# Altium PCB AfternoonCape_RevB1_TImux.PcbDoc
Units mil, origin at the board's own origin, x right, y up, seen from the top; angles counter-clockwise.
Board outline 3400 x 2150.01 mil, 2 copper layers (Top Layer, Bottom Layer); 38 components, 107 nets, 395 pads, 1 vias.
Unrouted connection lines stored in the file: 201.
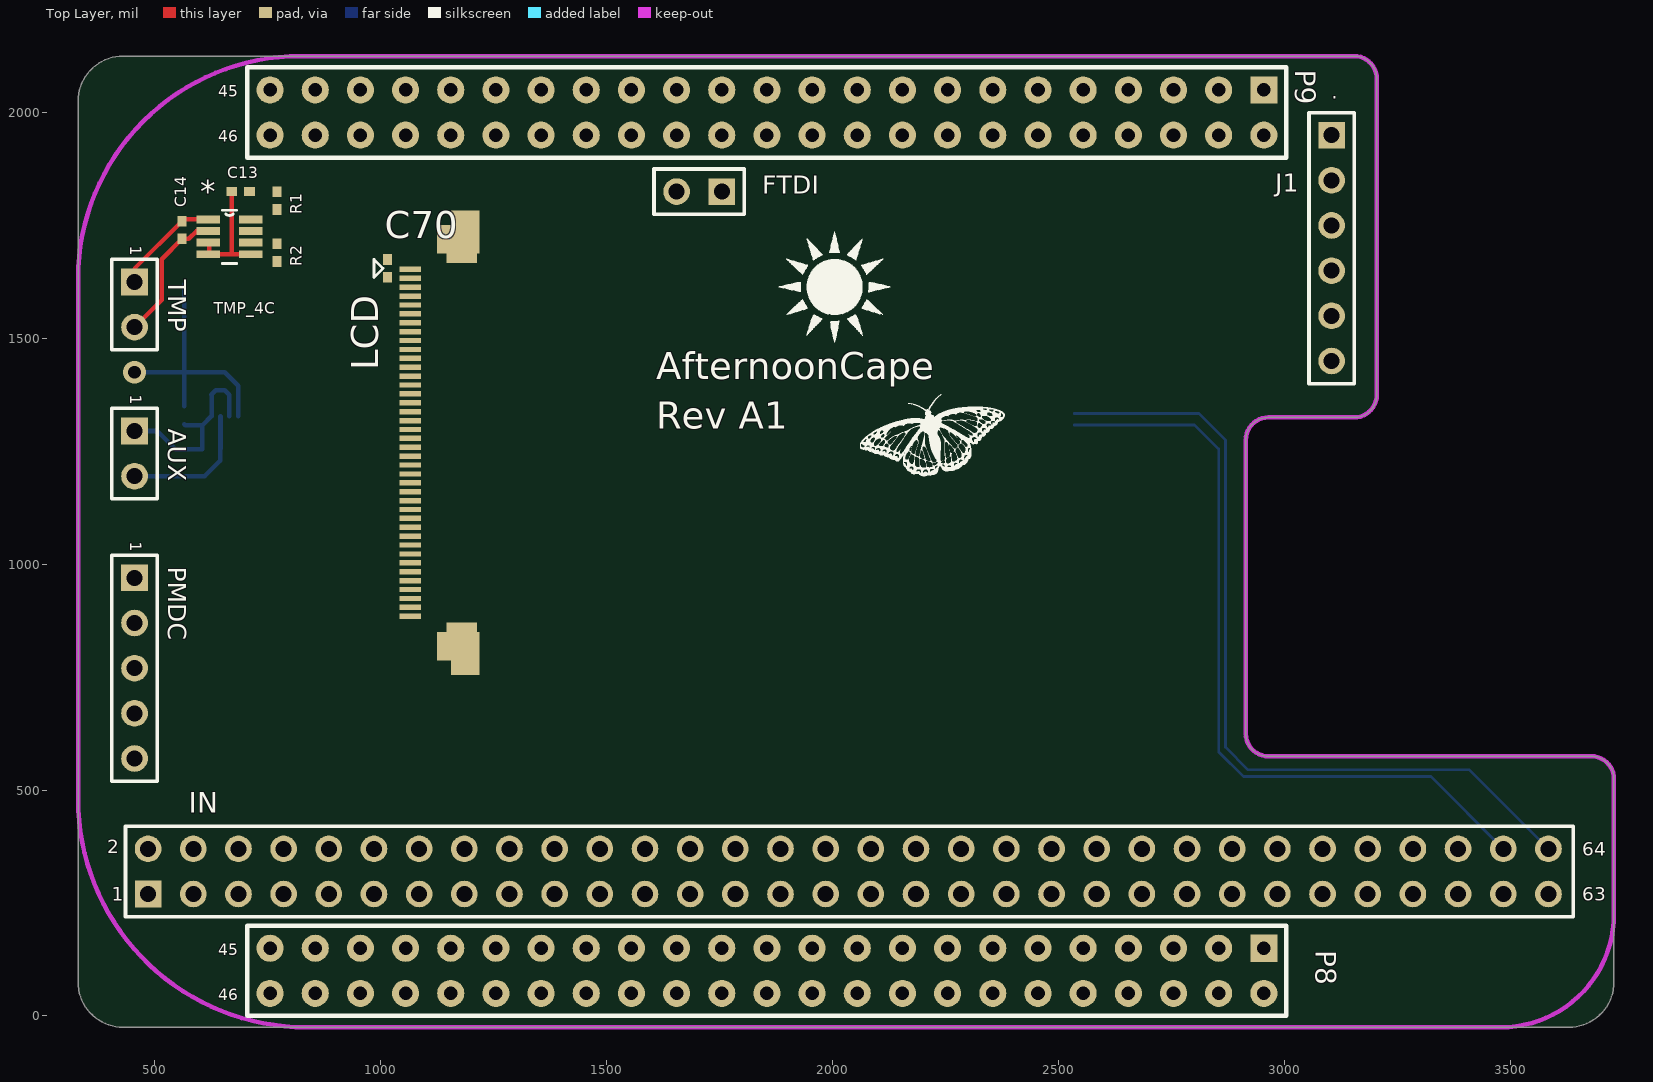
[diagram p0: Top Layer view]
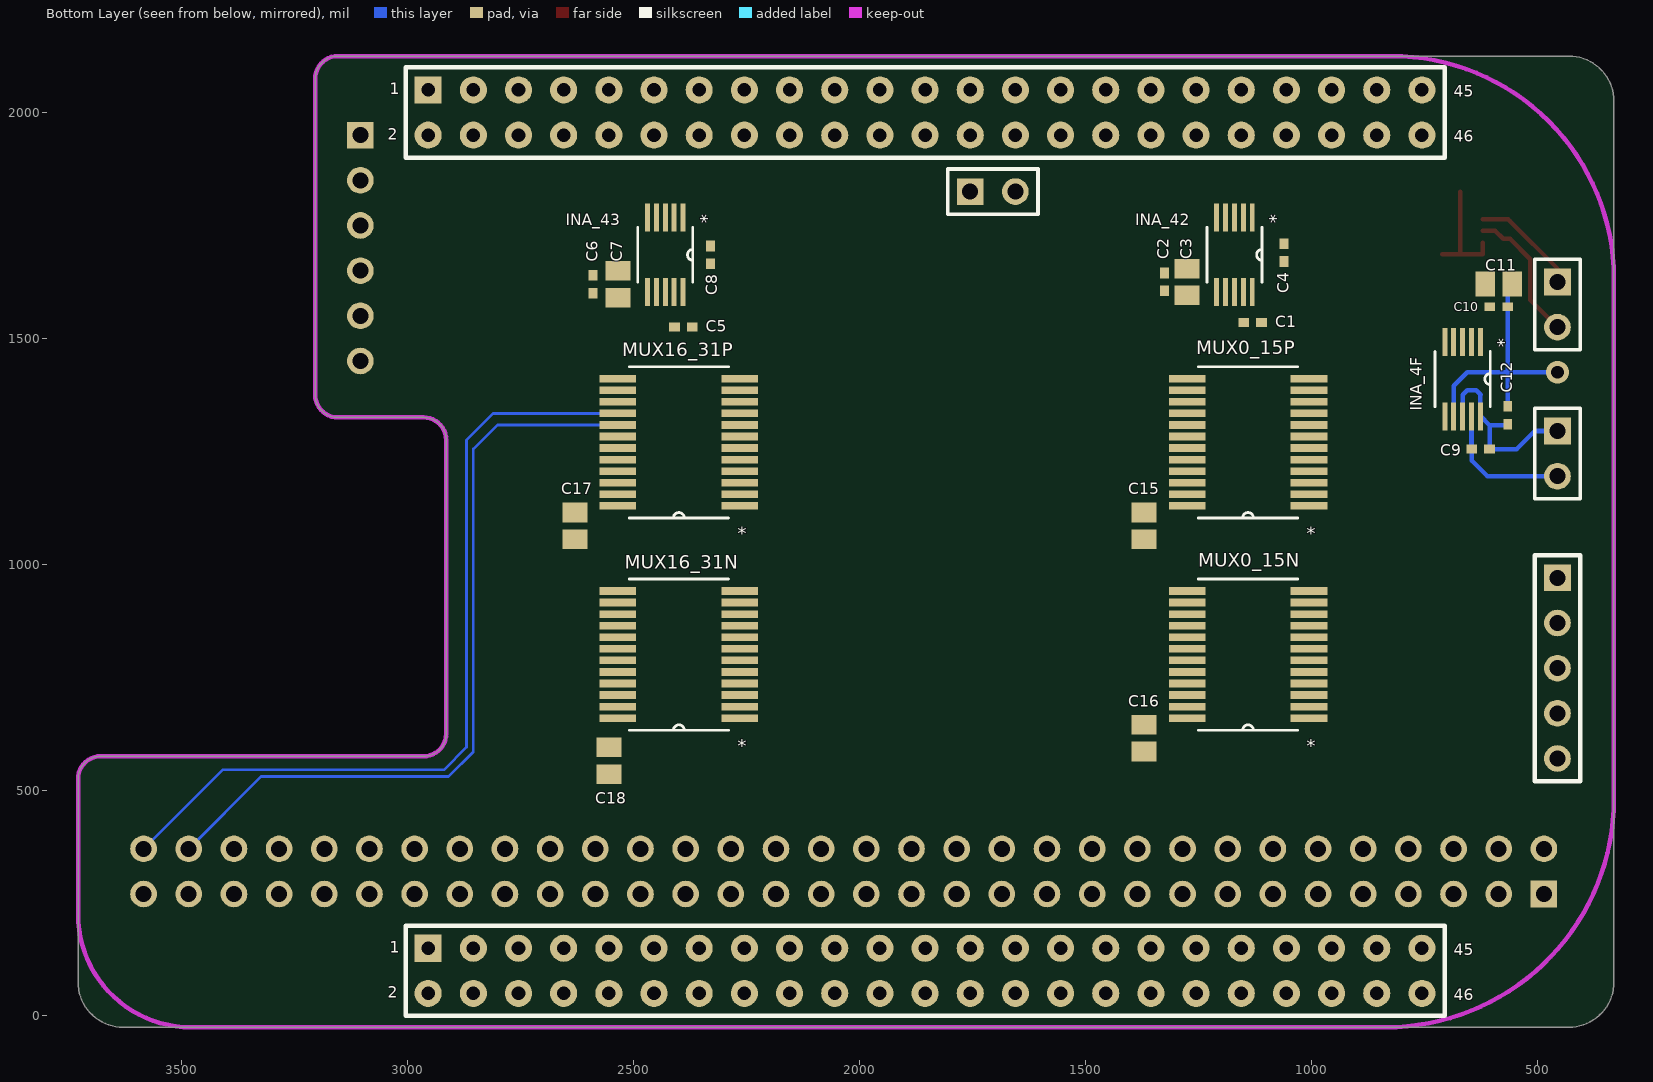
[diagram p1: Bottom Layer view, seen from below]

## Layer stack, top to bottom
Top Layer: signal copper 1.4
Dielectric: dielectric 12.6, FR-4, Dk 4.8
Bottom Layer: signal copper 1.4

## Board outline
3155,2125 3154.99,2125.01 822.5,2125.01 430,2125.01 ccw(c430,2025.01) 330,2025.01 330,480 330,75 ccw(c430,75) 430,-25 845,-25 3450,-25 3630,-25 ccw(c3630,75) 3730,75 3730,285 3730,525 ccw(c3680,525) 3680,575 2980,575 2965,575 cw(c2965,625) 2915,625 2915,1275 cw(c2965,1275) 2965,1325 2980,1325 3155,1325 ccw(c3155,1375) 3205,1375 3205,2075 ccw(c3155,2075) 3155,2125 3150,2125

## Design rules (kind name [scope] priority, off if disabled: settings)
Clearance [All] p1: gap=6
MinimumSolderMaskSliver [All] p1: minsoldermaskwidth=0
PolygonConnect [All] p1: connectstyle=Relief reliefconductorwidth=10 reliefentries=4 polygonreliefangle="90 Angle"
RoomDefinition AfternoonCape_RevB1_TImux [InComponentClass('AfternoonCape_RevB1_TImux')] p1: confinementstyle=ConfineIn formatcopy=TRUE lockcomponents=FALSE outline -450,-935 6010,-935 6010,2690 -450,2690
RoutingVias [All] p1: holewidth=13 width=27 viastyle="Through Hole" minholewidth=13 minwidth=27 maxholewidth=28 maxwidth=50
SilkscreenOverComponentPads [All] p1: minsilkscreentomaskgap=10
SolderMaskExpansion [All] p1: expansion=4
Width [All] p1: maxlimit=20 minlimit=6 preferedwidth=6
26 further rules are at their usual default settings.

## Components (designator, comment, footprint, x,y, rotation, side; value= is the part's Value field where it differs from the comment)
AUX "Header 2" HDR1X2 455,1295 r270 top
C1 "Cap Semi" 0402 1130,1535 r180 bottom
C2 "Cap Semi" 0402 1325,1625 r270 bottom
C3 "Cap Semi" C0805 1275,1625 r270 bottom
C4 "Cap Semi" 0402 1060,1690 r270 bottom
C5 "Cap Semi" 0402 2390,1525 r180 bottom
C6 "Cap Semi" 0402 2590,1620 r270 bottom
C7 "Cap Semi" C0805 2535,1620 r270 bottom
C8 "Cap Semi" 0402 2330,1685 r270 bottom
C9 "Cap Semi" 0402 625,1255 r180 bottom
C10 "Cap Semi" 0402 585,1570 r0 bottom
C11 "Cap Semi" C0805 585,1620 r0 bottom
C12 "Cap Semi" 0402 565,1330 r270 bottom
C13 "Cap Semi" 0402 690,1825 r0 top
C14 "Cap Semi" 0402 560,1740 r90 top
C15 "Cap Semi" C0805 1370,1085 r90 bottom
C16 "Cap Semi" C0805 1370,615 r90 bottom
C17 "Cap Semi" C0805 2630,1085 r90 bottom
C18 "Cap Semi" C0805 2555,565 r90 bottom
C70 "Cap Semi" 0402 1015,1655 r270 top
FTDI "Header 2" HDR1X2 1755,1825 r180 top
IN "Header 32x2" HDR2x32 485,270 r0 top
INA_4F "INA226" DGS10 665,1410 r270 bottom
INA_42 "INA226" DGS10 1170,1685 r270 bottom
INA_43 "INA226" DGS10 2430,1685 r270 bottom
J1 "Header 6" HDR1X6 3105,1950 r270 top
LCD "NHD-2.4" NHD-2.4 1065,885 r90 top
MUX0_15N "CD74HC4067_DB_24" DB24 1140,800 r0 bottom
MUX0_15P "CD74HC4067_DB_24" DB24 1140,1270 r0 bottom
MUX16_31N "CD74HC4067_DB_24" DB24 2400,800 r0 bottom
MUX16_31P "CD74HC4067_DB_24" DB24 2400,1270 r0 bottom
P8 "FEMALE HEADER 2x23" HEADER23X2 1855,100 r180 top
P9 "FEMALE HEADER 2x23" HEADER23X2 1855,2000 r180 top
PMDC "Header 5" HDR1X5 455,970 r270 top
R1 "Res3" 0402 770,1805 r90 top
R2 "Res3" 0402 770,1690 r270 top
TMP "Header 2" HDR1X2 455,1625 r270 top
TMP_4C "TMP441_DCN_8" DCN8 665,1725 r0 top

## Footprints (in the part's own frame and the unit in brackets; to place one, negate y for a bottom-side part, rotate by r counter-clockwise, add the part's x,y. Pads: shape width x height; smd on the part's side, far side on the other; paste and mask are expansions set on the pad)
0402 [mm] "Chip Capacitor, Body 1.0x0.5mm, IPC High Density"
  rect 0.6x0.5 smd: 1(-0.5,0) 2(0.5,0)
  body extent -0.55,-0.3 0.55,0.3, height 1.3
C0805 [mm] "Chip Capacitor, Body 2.0x1.3mm, IPC High Density"
  rect 1.1x1.4 smd: 1(-0.75,0) 2(0.75,0)
  body extent -1.1,-0.72 1.1,0.72, height 1.4
DB24 [mil]
  rect 81x17 smd: 1(-135,140.75) 2(-135,115.16) 3(-135,89.57) 4(-135,63.98) 5(-135,38.39) 6(-135,12.8) 7(-135,-12.8) 8(-135,-38.39) 9(-135,-63.98) 10(-135,-89.57) 11(-135,-115.16) 12(-135,-140.75) 13(135,-140.75) 14(135,-115.16) 15(135,-89.57) 16(135,-63.98) 17(135,-38.39) 18(135,-12.8) 19(135,12.8) 20(135,38.39) 21(135,63.98) 22(135,89.57) 23(135,115.16) 24(135,140.75)
  silkscreen extent -110,-168 110,168
DCN8 [mil]
  rect 52x17 smd: 1(-47,38.39) 2(-47,12.8) 3(-47,-12.8) 4(-47,-38.39) 5(47,-38.39) 6(47,-12.8) 7(47,12.8) 8(47,38.39)
  silkscreen extent -16,-59 16,59
DGS10 [mil]
  rect 62x11 smd: 1(-82.5,39.37) 2(-82.5,19.68) 3(-82.5,0) 4(-82.5,-19.68) 5(-82.5,-39.37) 6(82.5,-39.37) 7(82.5,-19.68) 8(82.5,0) 9(82.5,19.68) 10(82.5,39.37)
  silkscreen extent -61,-61 61,61, body extent -96,-59 97,59, height 37
HDR1X2 [mm] "Connector; Header; 2 Position"
  rect 1.5x1.5 hole 0.9: 1(0,0)
  round 1.5 hole 0.9: 2(2.54,0)
  silkscreen extent -1.27,-1.27 3.81,1.27
HDR1X5 [mm] "Connector; Header; 5 Position"
  rect 1.5x1.5 hole 0.9: 1(0,0)
  round 1.5 hole 0.9: 2(2.54,0) 3(5.08,0) 4(7.62,0) 5(10.16,0)
  silkscreen extent -1.27,-1.27 11.43,1.27
HDR1X6 [mm] "Connector; Header; 6 Position"
  rect 1.5x1.5 hole 0.9: 1(0,0)
  round 1.5 hole 0.9: 2(2.54,0) 3(5.08,0) 4(7.62,0) 5(10.16,0) 6(12.7,0)
  silkscreen extent -1.27,-1.27 13.97,1.27
HDR2x32 [mm]
  rect 1.5x1.5 hole 0.9: 1(0,0)
  round 1.5 hole 0.9: 2(0,2.54) 3(2.54,0) 4(2.54,2.54) 5(5.08,0) 6(5.08,2.54) 7(7.62,0) 8(7.62,2.54) 9(10.16,0) 10(10.16,2.54) 11(12.7,0) 12(12.7,2.54) 13(15.24,0) 14(15.24,2.54) 15(17.78,0) 16(17.78,2.54) 17(20.32,0) 18(20.32,2.54) 19(22.86,0) 20(22.86,2.54) 21(25.4,0) 22(25.4,2.54) 23(27.94,0) 24(27.94,2.54) 25(30.48,0) 26(30.48,2.54) 27(33.02,0) 28(33.02,2.54) 29(35.56,0) 30(35.56,2.54) 31(38.1,0) 32(38.1,2.54) 33(40.64,0) 34(40.64,2.54) 35(43.18,0) 36(43.18,2.54) 37(45.72,0) 38(45.72,2.54) 39(48.26,0) 40(48.26,2.54) 41(50.8,0) 42(50.8,2.54) 43(53.34,0) 44(53.34,2.54) 45(55.88,0) 46(55.88,2.54) 47(58.42,0) 48(58.42,2.54) 49(60.96,0) 50(60.96,2.54) 51(63.5,0) 52(63.5,2.54) 53(66.04,0) 54(66.04,2.54) 55(68.58,0) 56(68.58,2.54) 57(71.12,0) 58(71.12,2.54) 59(73.66,0) 60(73.66,2.54) 61(76.2,0) 62(76.2,2.54) 63(78.74,0) 64(78.74,2.54)
  silkscreen extent -1.27,-1.27 80.14,3.81
HEADER23X2 [mil] "HEADER23X2"
  rect 60x60 hole 30 mask+2: 1(-1100,-50)
  round 60 hole 30 mask+2: 2(-1100,50) 3(-1000,-50) 4(-1000,50) 5(-900,-50) 6(-900,50) 7(-800,-50) 8(-800,50) 9(-700,-50) 10(-700,50) 11(-600,-50) 12(-600,50) 13(-500,-50) 14(-500,50) 15(-400,-50) 16(-400,50) 17(-300,-50) 18(-300,50) 19(-200,-50) 20(-200,50) 21(-100,-50) 22(-100,50) 23(0,-50) 24(0,50) 25(100,-50) 26(100,50) 27(200,-50) 28(200,50) 29(300,-50) 30(300,50) 31(400,-50) 32(400,50) 33(500,-50) 34(500,50) 35(600,-50) 36(600,50) 37(700,-50) 38(700,50) 39(800,-50) 40(800,50) 41(900,-50) 42(900,50) 43(1000,-50) 44(1000,50) 45(1100,-50) 46(1100,50)
  silkscreen extent -1150,-100 1150,100
NHD-2.4 [mm]
  rect 0.3x1.2 smd: 1(19.5,0) 2(19,0) 3(18.5,0) 4(18,0) 5(17.5,0) 6(17,0) 7(16.5,0) 8(16,0) 9(15.5,0) 10(15,0) 11(14.5,0) 12(14,0) 13(13.5,0) 14(13,0) 15(12.5,0) 16(12,0) 17(11.5,0) 18(11,0) 19(10.5,0) 20(10,0) 21(9.5,0) 22(9,0) 23(8.5,0) 24(8,0) 25(7.5,0) 26(7,0) 27(6.5,0) 28(6,0) 29(5.5,0) 30(5,0) 31(4.5,0) 32(4,0) 33(3.5,0) 34(3,0) 35(2.5,0) 36(2,0) 37(1.5,0) 38(1,0) 39(0.5,0) 40(0,0)
  rect 0.8x1.6 smd: ""(-2.9,-3.1) ""(22.4,-3.1)
  rect 1.6x2.4 smd: ""(-1.7,-2.7) ""(21.2,-2.7)
  rect 0.55x1.7 smd: ""(-0.625,-2.9) ""(20.125,-2.9)
  silkscreen extent 19.05,1.52 20.07,2.03, body extent -2.97,-6.78 22.53,0.38, height 2

## Part data
AUX FTDI TMP: "Header, 2-Pin"
C1 C2 C3 C4 C5 C6 C7 C8 C9 C10 C11 C12 C13 C14 C15 C16 C17 C18 C70: "Capacitor (Semiconductor SIM Model)"
IN: "Header, 32-Pin, Dual row"
J1: "6-pin female header, long legs for FTDI-USB cable"
LCD: "2.4\" LCD NHD-2.4-240320SF-CTXL#-FTN1 54132-4062 Molex LCD Connector Footprint"
MUX0_15N MUX0_15P MUX16_31N MUX16_31P TMP_4C: "Imported"
P8 P9: library part HDR_46_F_2_0.1_0.1, "CONN HEADER FMAL 46PS.1\" DL GOLD"
PMDC: "Header, 5-Pin"
R1 R2: "Resistor"

## Via types
v1: diameter 50, hole 28, Top Layer to Bottom Layer, 1 vias

## Nets (pads, with @x,y where several pads share a name; then routed paths per layer and width w, separated by ;. In a path a pad name is that pad's centre, name@x,y a point inside that pad or via, vN(x,y) a via of type N, cw(c..) or ccw(c..) an arc to the next point about the centre after c; other vN are vias at no path point)
AIN0: LCD.3 P9.39
AIN1: LCD.5 P9.40
AIN2: LCD.4 P9.37
AIN3: LCD.2 P9.38
ALERT: PMDC.4
AUX_N: AUX.2 C9.1 INA_4F.9 | length 302.1
  Bottom Layer w10: AUX.2 610,1195 644.68,1229.68 C9.1 645.32,1255.63 INA_4F.9
AUX_P: AUX.1 C9.2 C12.2 INA_4F.8 INA_4F.10 | length 432.3
  Bottom Layer w10: AUX.1 505,1295 545,1255 C9.2 605.31,1308 ; C12.2 567.32,1308 605.31,1308 ; INA_4F.10@624.82,1327.5 605.31,1308 ; INA_4F.10 625.63,1374.37 625,1375 635,1385 655,1385 665,1375 INA_4F.8
B_UART0_RX: FTDI.1 J1.4
B_UART0_TX: FTDI.2 J1.5
CH0_N: IN.1 MUX0_15N.9
CH0_P: IN.2 MUX0_15P.9
CH1_N: IN.3 MUX0_15N.8
CH1_P: IN.4 MUX0_15P.8
CH2_N: IN.5 MUX0_15N.7
CH2_P: IN.6 MUX0_15P.7
CH3_N: IN.7 MUX0_15N.6
CH3_P: IN.8 MUX0_15P.6
CH4_N: IN.9 MUX0_15N.5
CH4_P: IN.10 MUX0_15P.5
CH5_N: IN.11 MUX0_15N.4
CH5_P: IN.12 MUX0_15P.4
CH6_N: IN.13 MUX0_15N.3
CH6_P: IN.14 MUX0_15P.3
CH7_N: IN.15 MUX0_15N.2
CH7_P: IN.16 MUX0_15P.2
CH8_N: IN.17 MUX0_15N.23
CH8_P: IN.18 MUX0_15P.23
CH9_N: IN.19 MUX0_15N.22
CH9_P: IN.20 MUX0_15P.22
CH10_N: IN.21 MUX0_15N.21
CH10_P: IN.22 MUX0_15P.21
CH11_N: IN.23 MUX0_15N.20
CH11_P: IN.24 MUX0_15P.20
CH12_N: IN.25 MUX0_15N.19
CH12_P: IN.26 MUX0_15P.19
CH13_N: IN.27 MUX0_15N.18
CH13_P: IN.28 MUX0_15P.18
CH14_N: IN.29 MUX0_15N.17
CH14_P: IN.30 MUX0_15P.17
CH15_N: IN.31 MUX0_15N.16
CH15_P: IN.32 MUX0_15P.16
CH16_N: IN.33 MUX16_31N.9
CH16_P: IN.34 MUX16_31P.9
CH17_N: IN.35 MUX16_31N.8
CH17_P: IN.36 MUX16_31P.8
CH18_N: IN.37 MUX16_31N.7
CH18_P: IN.38 MUX16_31P.7
CH19_N: IN.39 MUX16_31N.6
CH19_P: IN.40 MUX16_31P.6
CH20_N: IN.41 MUX16_31N.5
CH20_P: IN.42 MUX16_31P.5
CH21_N: IN.43 MUX16_31N.4
CH21_P: IN.44 MUX16_31P.4
CH22_N: IN.45 MUX16_31N.3
CH22_P: IN.46 MUX16_31P.3
CH23_N: IN.47 MUX16_31N.2
CH23_P: IN.48 MUX16_31P.2
CH24_N: IN.49 MUX16_31N.23
CH24_P: IN.50 MUX16_31P.23
CH25_N: IN.51 MUX16_31N.22
CH25_P: IN.52 MUX16_31P.22
CH26_N: IN.53 MUX16_31N.21
CH26_P: IN.54 MUX16_31P.21
CH27_N: IN.55 MUX16_31N.20
CH27_P: IN.56 MUX16_31P.20
CH28_N: IN.57 MUX16_31N.19
CH28_P: IN.58 MUX16_31P.19
CH29_N: IN.59 MUX16_31N.18
CH29_P: IN.60 MUX16_31P.18
CH30_N: IN.61 MUX16_31N.17
CH30_P: IN.62 MUX16_31P.17 | length 1731.2
  Bottom Layer w6: MUX16_31P.17 2801.61,1308.39 2855,1255 2855,585 2910,530 3325,530 IN.62
CH31_N: IN.63 MUX16_31N.16
CH31_P: IN.64 MUX16_31P.16 | length 1847.6
  Bottom Layer w6: MUX16_31P.16 2811.02,1333.98 2870,1275 2870,595 2920,545 3410,545 IN.64
GND: C2.1 C3.1 C4.1 C6.1 C7.1 C8.1 C10.1 C11.1 C12.1 C13.1 C15.1 C16.1 C17.1 C18.1 C70.1 INA_4F.7 INA_42.1 INA_42.7 INA_43.1 INA_43.7 J1.1 LCD.1 LCD.10 LCD.33 LCD.34 LCD.35 LCD.36 LCD.37 LCD.39 MUX0_15N.12 MUX0_15N.15 MUX0_15P.12 MUX0_15P.15 MUX16_31N.12 MUX16_31N.15 MUX16_31P.12 MUX16_31P.15 P8.1 P8.2 P9.1 P9.2 P9.43 P9.44 P9.45 P9.46 PMDC.3 TMP_4C.3 TMP_4C.4 TMP_4C.5 | length 834.2
  Top Layer w10: TMP_4C.3@620,1712.2 620,1686.61 670,1686.61 ; C13.1 670.32,1686.93 670,1686.61 ; TMP_4C.5@710,1686.61 670,1686.61
  Bottom Layer w10: v1(455,1425) 565,1425 ; C12.1 565,1425 ; C11.1@565.32,1620 C10.1 565.32,1425.32 565,1425 ; INA_4F.7 684.68,1395 654.68,1425 565,1425
I2C2_SCL: INA_4F.1 INA_4F.2 INA_4F.5 INA_42.5 INA_43.2 INA_43.5 P9.19 PMDC.1 R1.1 TMP_4C.7
I2C2_SDA: INA_4F.4 INA_42.2 INA_42.4 INA_43.4 P9.20 PMDC.2 R2.1 TMP_4C.6
LCD_DATA0: LCD.14 P8.45
LCD_DATA1: LCD.15 P8.46
LCD_DATA2: LCD.16 P8.43
LCD_DATA3: LCD.17 P8.44
LCD_DATA4: LCD.18 P8.41
LCD_DATA5: LCD.19 P8.42
LCD_DATA6: LCD.20 P8.39
LCD_DATA7: LCD.21 P8.40
LCD_DATA8: LCD.22 P8.37
LCD_DATA9: LCD.23 P8.38
LCD_DATA10: LCD.24 P8.36
LCD_DATA11: LCD.25 P8.34
LCD_DATA12: LCD.26 P8.35
LCD_DATA13: LCD.27 P8.33
LCD_DATA14: LCD.28 P8.31
LCD_DATA15: LCD.29 P8.32
LCD_HSYNC: LCD.12 P8.29
LCD_PCLK: LCD.13 P8.28
LCD_VSYNC: LCD.11 P8.27
MUX1_N: C1.1 INA_42.9 MUX0_15N.1
MUX1_P: C1.2 C4.2 INA_42.8 INA_42.10 MUX0_15P.1
MUX2_N: C5.1 INA_43.9 MUX16_31N.1
MUX2_P: C5.2 C8.2 INA_43.8 INA_43.10 MUX16_31P.1
MUX_SEL0: MUX0_15N.10 MUX0_15P.10 MUX16_31N.10 MUX16_31P.10 P8.12
MUX_SEL1: MUX0_15N.11 MUX0_15P.11 MUX16_31N.11 MUX16_31P.11 P9.23
MUX_SEL2: MUX0_15N.14 MUX0_15P.14 MUX16_31N.14 MUX16_31P.14 P9.27
MUX_SEL3: MUX0_15N.13 MUX0_15P.13 MUX16_31N.13 MUX16_31P.13 P9.12
PADN: C14.1 TMP.2 TMP_4C.2 | length 306
  Top Layer w10: TMP.2 515,1585 515,1675.32 C14.1 575.32,1720.32 592.8,1737.8 TMP_4C.2@620,1737.8
PADP: C14.2 TMP.1 TMP_4C.1 | length 239.7
  Top Layer w10: TMP.1 455,1654.69 C14.2 563.7,1763.39 TMP_4C.1@620,1763.39
SYS_RESETN: LCD.30 P9.10
V3_3D: C2.2 C3.2 C6.2 C7.2 C10.2 C11.2 C13.2 C15.2 C16.2 C17.2 C18.2 C70.2 INA_4F.6 INA_42.6 INA_43.6 LCD.7 LCD.8 LCD.38 MUX0_15N.24 MUX0_15P.24 MUX16_31N.24 MUX16_31P.24 P9.3 P9.4 PMDC.5 R1.2 R2.2 TMP_4C.8
pads on no net: INA_4F.3 INA_42.3 INA_43.3 J1.2 J1.3 J1.6 LCD. LCD.6 LCD.9 LCD.31 LCD.32 LCD.40 P8.3 P8.4 P8.5 P8.6 P8.7 P8.8 P8.9 P8.10 P8.11 P8.13 P8.14 P8.15 P8.16 P8.17 P8.18 P8.19 P8.20 P8.21 P8.22 P8.23 P8.24 P8.25 P8.26 P8.30 P9.5 P9.6 P9.7 P9.8 P9.9 P9.11 P9.13 P9.14 P9.15 P9.16 P9.17 P9.18 P9.21 P9.22 P9.24 P9.25 P9.26 P9.28 P9.29 P9.30 P9.31 P9.32 P9.33 P9.34 P9.35 P9.36 P9.41 P9.42

## Keep-outs
Keep-Out Layer:
  lines w10: 329.99,1632.5 cw(c822.5,1632.5) 822.5,2125.01 ; 330,1635 330,480 ccw(c835,480) 835,-25 3480,-25 ccw(c3480,225) 3730,225 3730,525 ccw(c3680,525) 3680,575 3620,575 2970,575 2965,575 cw(c2965,625) 2915,625 2915,645 2915,1260 2915,1275 cw(c2965,1275) 2965,1325 2995,1325 3145,1325 3155,1325 ccw(c3155,1375) 3205,1375 3205,1405 3205,1525 3205,2000 3205,2075 ccw(c3155,2075) 3155,2125 3080,2125 825,2125

## Silkscreen, mask and mechanical layers (free items; w line width, h text height)
Top Overlay:
  drawing of 16 lines, arcs and shapes, not listed
  text "." at 3105,2030 h30
  text "1" at 445,1705 h25 r270
  text "AfternoonCape" at 1610,1410 h60
  text "1" at 445,1375 h25 r270
  text "Rev A1" at 1610,1300 h60
  text "1" at 445,1050 h25 r270

## Text inside footprints (layer, text, board x,y; h text height)
IN: Top Overlay "2" at 395,360 h30; Top Overlay "1" at 405,255 h30; Top Overlay "64" at 3660,355 h30; Top Overlay "63" at 3660,255 h30
INA_4F: Bottom Overlay "*" at 600,1500 h30 r90
INA_42: Bottom Overlay "*" at 1105,1775 h30 r90
INA_43: Bottom Overlay "*" at 2365,1775 h30 r90
MUX0_15N: Bottom Overlay "*" at 990,625 h30 r180
MUX0_15P: Bottom Overlay "*" at 990,1095 h30 r180
MUX16_31N: Bottom Overlay "*" at 2250,625 h30 r180
MUX16_31P: Bottom Overlay "*" at 2250,1095 h30 r180
P8: Top Overlay "46" at 640,35 h25; Top Overlay "45" at 640,135 h25; Bottom Overlay "45" at 685,135 h25; Bottom Overlay "46" at 685,35 h25; Bottom Overlay "2" at 3045,40 h25; Bottom Overlay "1" at 3040,140 h25
P9: Top Overlay "46" at 640,1935 h25; Top Overlay "45" at 640,2035 h25; Bottom Overlay "45" at 685,2035 h25; Bottom Overlay "46" at 685,1935 h25; Bottom Overlay "2" at 3045,1940 h25; Bottom Overlay "1" at 3040,2040 h25
TMP_4C: Top Overlay "*" at 600,1800 h50; Mechanical 1 "*" at 600,1800 h50